# EAGLE board leddisplay2013-1015 (EAGLE 6.5.0)
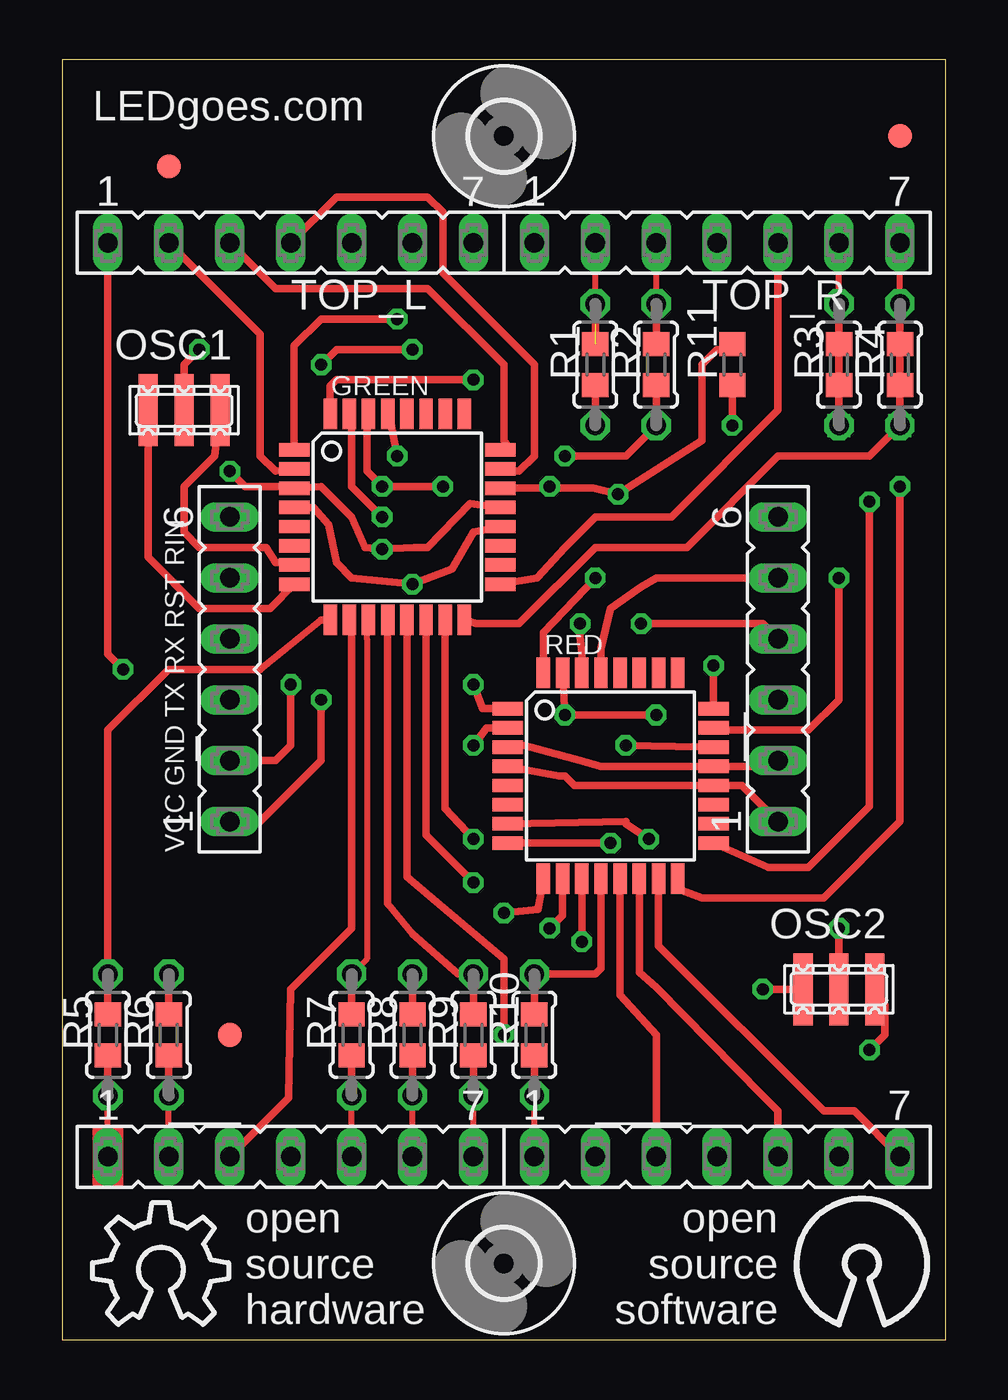
[diagram p0: board, top side]
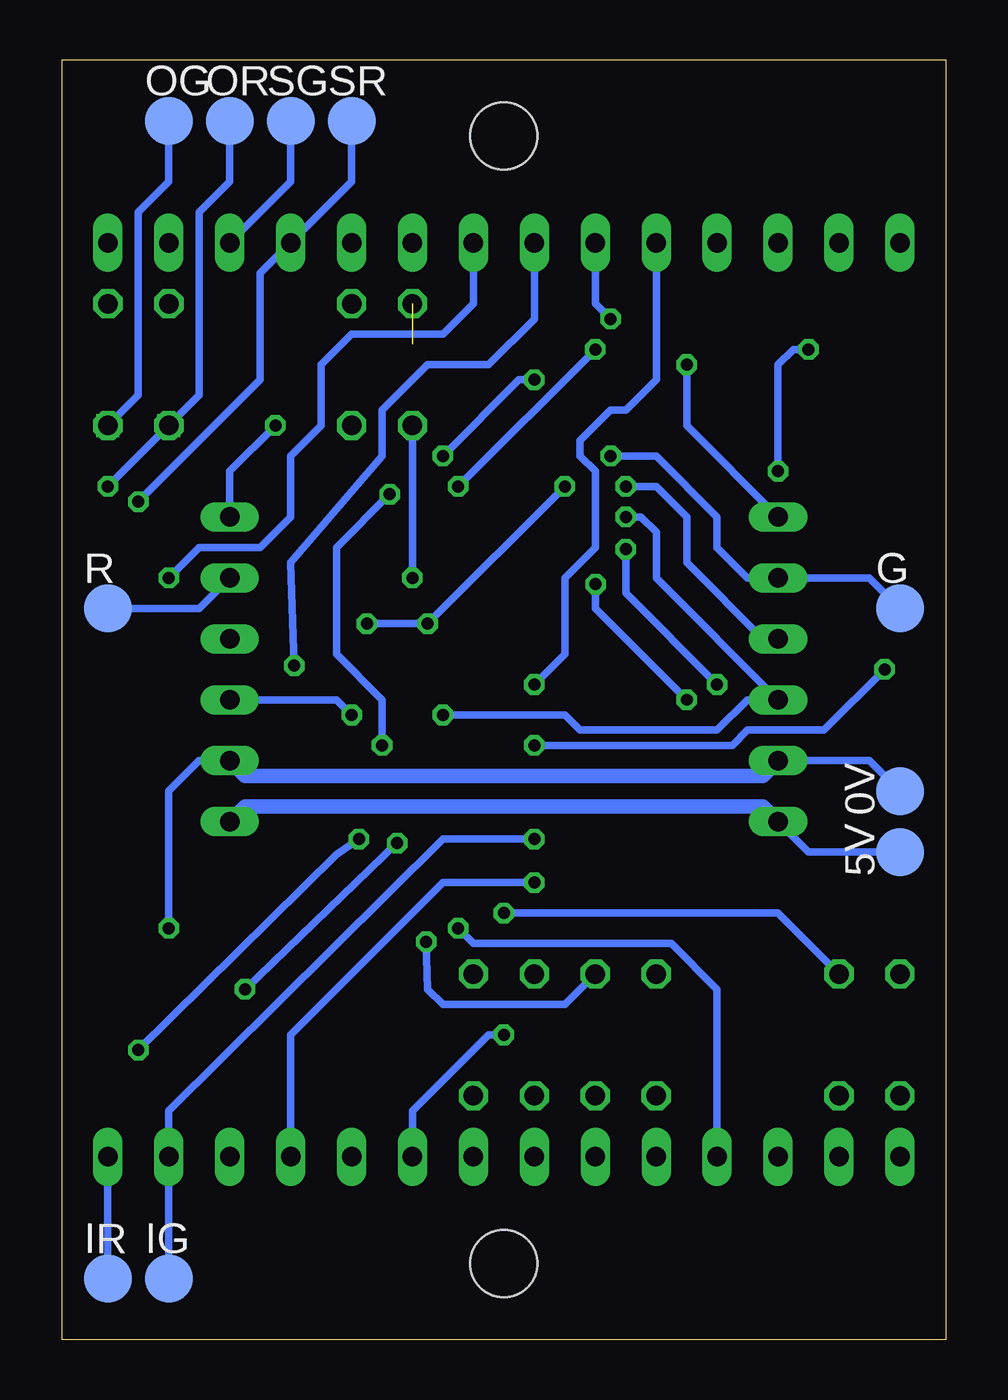
[diagram p1: board, bottom side, seen from below]

Size 36.83 x 53.34 mm. Coordinates in mm from the lower left corner, seen from the top.
Outline: 0,53.34 0,0 36.83,0 36.83,53.34 0,53.34
Copper layers (1*16): Top 0.0356mm / dielectric 1.5011mm / Bottom 0.0356mm
Design rules "LaenPCBOrder *": minimum track width 6mil, minimum drill 13mil, track to track 6mil, track to pad 6mil, pad to pad 6mil, via to via 6mil, smd to smd 6mil, copper to edge 15mil, drill to drill 6mil, minimum pad ring 7mil, minimum via ring 7mil, stop-mask expansion 4mil, vias tented up to drill 0mil, thermal gap 10mil
tKeepout: area 3.2,47.6 to 5.7,50.2; area 5.7,11.4 to 8.3,14; area 33.7,48.9 to 36.2,51.4
bKeepout: area 3.2,47.6 to 5.7,50.2; area 5.7,11.4 to 8.3,14; area 33.7,48.9 to 36.2,51.4

## Footprints (pad centres in the part's own frame; a part is rotated, then mirrored left to right if it is on the bottom)
TP20R = smd 2 x 2: TP 0,0
FE06 = drill 0.813 long: 1 -6.35,0; 2 -3.81,0; 3 -1.27,0; 4 1.27,0; 5 3.81,0; 6 6.35,0
FE07 = drill 0.813 long: 1 -7.62,0; 2 -5.08,0; 3 -2.54,0; 4 0,0; 5 2.54,0; 6 5.08,0; 7 7.62,0
0204/5 = drill 0.813 octagon: 1 -2.54,0; 2 2.54,0
2,8 = hole 2.8: 0,0
FIDUCIAL_1MM = smd 1 x 1: 1 0,0
TQFP32-08 = smd 1.27 x 0.559: 1 -4.293,2.8; 2 -4.293,2; 3 -4.293,1.2; 4 -4.293,0.4; 5 -4.293,-0.4; 6 -4.293,-1.2; 7 -4.293,-2; 8 -4.293,-2.8; 17 4.293,-2.8; 18 4.293,-2; 19 4.293,-1.2; 20 4.293,-0.4; 21 4.293,0.4; 22 4.293,1.2; 23 4.293,2; 24 4.293,2.8 | smd 0.559 x 1.27: 9 -2.8,-4.293; 10 -2,-4.293; 11 -1.2,-4.293; 12 -0.4,-4.293; 13 0.4,-4.293; 14 1.2,-4.293; 15 2,-4.293; 16 2.8,-4.293; 25 2.8,4.293; 26 2,4.293; 27 1.2,4.293; 28 0.4,4.293; 29 -0.4,4.293; 30 -1.2,4.293; 31 -2,4.293; 32 -2.8,4.293
CSTCR-G = smd 0.8 x 3: 1 -1.5,0; 2 0,0; 3 1.5,0
R0603 = smd 1 x 1.1: 1 -0.85,0; 2 0.85,0

## Placement (x,y rotation side)
0V  [TP20R]  1.91,22.86 90 bottom
5V  [TP20R]  1.91,20.32 90 bottom
_  [FE06]  6.99,27.94 90 top
__  [FE06]  29.85,27.94 90 top
___  [FE07]  9.53,7.62 0 top
____  [FE07]  27.3,7.62 0 top
E$1  [OSHW_8X200_NOTEXT]  1.27,0.64 0 top
E$2  [0204/5]  34.93,40.64 90 top
E$3  [2,8]  18.42,50.16 0 top
E$4  [2,8]  18.42,3.17 0 top
E$5  [FIDUCIAL_1MM]  4.45,48.89 0 top
E$6  [FIDUCIAL_1MM]  34.93,50.16 0 top
E$7  [0204/5]  32.38,40.64 90 top
E$8  [0204/5]  24.77,40.64 90 top
E$9  [0204/5]  22.23,40.64 90 top
E$10  [0204/5]  1.91,12.7 90 top
E$11  [0204/5]  4.45,12.7 90 top
E$12  [0204/5]  12.06,12.7 90 top
E$13  [0204/5]  14.6,12.7 90 top
E$14  [0204/5]  17.14,12.7 90 top
E$15  [0204/5]  19.69,12.7 90 top
E$16  [FIDUCIAL_1MM]  6.99,12.7 0 top
G  [TP20R]  1.91,30.48 0 bottom
GREEN  [TQFP32-08]  13.97,34.29 0 top
IG  [TP20R]  32.38,2.54 0 bottom
IR  [TP20R]  34.93,2.54 0 bottom
OG  [TP20R]  32.38,50.8 0 bottom
OR  [TP20R]  29.85,50.8 0 bottom
OSC1  16MHz  [CSTCR-G]  5.08,38.73 0 top
OSC2  16MHz  [CSTCR-G]  32.38,14.61 0 top
R  [TP20R]  34.93,30.48 0 bottom
R1  [R0603]  22.23,40.64 90 top
R2  [R0603]  24.77,40.64 90 top
R3  [R0603]  32.38,40.64 90 top
R4  [R0603]  34.93,40.64 90 top
R5  [R0603]  1.91,12.7 90 top
R6  [R0603]  4.45,12.7 90 top
R7  [R0603]  12.06,12.7 90 top
R8  [R0603]  14.6,12.7 90 top
R9  [R0603]  17.14,12.7 90 top
R10  [R0603]  19.69,12.7 90 top
R11  [R0603]  27.94,40.64 90 top
RED  [TQFP32-08]  22.86,23.49 0 top
SG  [TP20R]  27.3,50.8 0 bottom
SR  [TP20R]  24.77,50.8 0 bottom
TOP_L  [FE07]  9.53,45.72 0 top
TOP_R  [FE07]  27.3,45.72 0 top

## Library data of the parts
0V 5V G IG IR OG OR R SG SR = testpad
_ __ ___ ____ TOP_L TOP_R = con-lsta
E$1 = ohw-logo
E$2 E$7-E$15 R1-R11 = rcl
E$3 E$4 = holes
E$5 E$6 E$16 OSC1 OSC2 = adafruit
GREEN RED = atmega8

## Nets
S$1: ___.1 E$10.1
S$2: ___.3 GREEN.10
S$3: ___.5 E$12.1
S$4: ___.7 E$14.1
S$5: ____.2 GREEN.13
S$6: ____.4 GREEN.14
S$7: ____.6 GREEN.15 IG.TP
S$8: ___.2 E$11.1
S$9: ___.4 RED.10
S$10: ___.6 E$13.1
S$11: ____.1 E$15.1
S$12: ____.3 RED.13
S$13: GREEN.2 TOP_L.2
S$14: ____.7 IR.TP RED.15
S$15: E$7.2 OR.TP TOP_R.6
S$16: OSC2.3 RED.7
S$17: E$9.2 R1.2 TOP_R.2
S$18: RED.1 TOP_L.5
S$19: RED.2 TOP_L.1
S$20: GREEN.1 TOP_L.6
S$21: OSC2.1 RED.8
S$22: E$8.2 TOP_R.3
S$23: _.5 G.TP GREEN.29
S$24: E$2.2 OG.TP TOP_R.7
S$25: E$10.2 GREEN.9
S$26: E$11.2 RED.9
S$27: E$9.1 RED.32
S$28: E$12.2 GREEN.11
S$29: _.4 __.4 GREEN.30 RED.30
S$30: E$14.2 GREEN.12
S$31: E$15.2 RED.12
S$32: E$2.1 GREEN.16
S$33: E$7.1 RED.16
S$34: E$8.1 GREEN.32
S$35: ____.5 RED.14
S$36: E$13.2 RED.11
S$37: RED.17 SR.TP TOP_R.4
S$38: GREEN.8 OSC1.1
S$39: GREEN.7 OSC1.3
S$40: RED.24 TOP_L.7
S$41: RED.23 TOP_R.1
S$42: GREEN.23 TOP_L.4
S$43: GREEN.17 SG.TP TOP_R.5
S$44: GREEN.24 TOP_L.3
S$45: 5V.TP _.1 __.1 GREEN.4 GREEN.20 RED.4 RED.20
S$46: __.6 R11.1
S$47: 0V.TP _.2 __.2 GREEN.3 GREEN.21 OSC1.2 OSC2.2 RED.3 RED.21
S$48: _.6 GREEN.22 R11.2 RED.22
S$49: __.5 R.TP RED.29
S$50: _.3 __.3 GREEN.31 RED.31

## Tracks (layer width: path | path; a pad name or v marks a point on that pad's centre or on a via)
S$1
  Top 0.254: ___.1 E$10.1
  Top 0.305: 1.91,12.07 E$10.1
S$2
  Top 0.305: GREEN.10 12.06,29.36 12.06,17.14 9.53,14.61 9.43,10.07 ___.3
S$3
  Top 0.254: ___.5 E$12.1
  Top 0.305: 12.06,12.07 E$12.1
S$4
  Top 0.254: ___.7 E$14.1
  Top 0.305: 17.14,11.43 E$14.1
S$5  (via drill 0.5 pad 0.25)
  Top 0.305: GREEN.13 14.37,19.29 15.88,18.02 18.42,15.88 v18.42,12.7
  Bottom 0.305: v18.42,12.7 19.05,12.7 22.23,9.53 ____.2
S$6  (via drill 0.5 pad 0.25)
  Top 0.305: GREEN.14 15.17,21.02 v17.14,19.05
  Bottom 0.305: v17.14,19.05 20.96,19.05 27.3,12.7 ____.4
S$7  (via drill 0.5 pad 0.25)
  Top 0.305: GREEN.15 15.97,22.13 v17.14,20.86
  Bottom 0.305: v17.14,20.86 20.96,20.86 32.38,9.53 ____.6 IG.TP
S$8
  Top 0.254: ___.2 E$11.1
  Top 0.305: 4.45,11.43 E$11.1
S$9  (via drill 0.5 pad 0.25)
  Top 0.305: RED.10 20.86,17.68 v20.32,17.14
  Bottom 0.305: v20.32,17.14 19.69,16.51 11.43,16.51 9.53,14.61 ___.4
S$10
  Top 0.254: ___.6 E$13.1
  Top 0.305: 14.6,12.07 E$13.1
S$11
  Top 0.254: ____.1 E$15.1
  Top 0.305: 19.69,12.07 E$15.1
S$12
  Top 0.305: RED.13 23.26,14.37 24.77,12.7 ____.3
S$13
  Top 0.305: GREEN.2 8.89,36.2 8.25,36.83 8.25,41.91 TOP_L.2
S$14
  Top 0.305: RED.15 24.86,16.41 31.75,9.53 33.02,9.53 ____.7
  Bottom 0.305: ____.7 IR.TP
S$15  (via drill 0.6)
  Top 0.254: E$7.2 TOP_R.6
  Top 0.305: v32.38,38.1 E$7.2
  Bottom 0.305: OR.TP 29.85,48.26 31.12,46.99 31.12,39.37 v32.38,38.1
S$16  (via drill 0.5 pad 0.25)
  Top 0.305: RED.7 23.5,21.59 23.5,21.49 v24.46,20.86 | v33.66,12.07 34.29,12.7 34.29,13.97 OSC2.3
  Bottom 0.305: v24.46,20.86 25.4,20.22 v33.66,12.07
S$17  (2 unrouted)
  Top 0.254: E$9.2 TOP_R.2
  Top 0.305: E$9.2 22.23,41.27
S$18  (via drill 0.5 pad 0.25)
  Top 0.305: RED.1 17.52,26.29 v17.14,27.3
  Bottom 0.305: v17.14,27.3 15.88,28.57 15.88,31.75 14.6,33.02 14.6,36.2 15.24,36.83 15.24,37.46 13.97,38.73 13.33,38.73 12.06,40.01 TOP_L.5
S$19  (via drill 0.5, 0.5 pad 0.25)
  Top 0.305: RED.2 17.68,25.49 v17.14,24.77 | v2.54,27.94 1.91,28.57 TOP_L.1
  Bottom 0.305: v17.14,24.77 8.89,24.77 8.25,25.4 5.08,25.4 v2.54,27.94
S$20  (via drill 0.5 pad 0.25)
  Top 0.305: GREEN.1 9.68,41.43 10.79,42.55 v13.97,42.55
  Bottom 0.305: v13.97,42.55 14.6,43.18 TOP_L.6
S$21  (via drill 0.5 pad 0.25)
  Top 0.305: RED.8 v22.86,20.7 | v29.21,14.61 OSC2.1
  Bottom 0.305: v22.86,20.7 v29.21,14.61
S$22
  Top 0.254: E$8.2 TOP_R.3
  Top 0.305: E$8.2 24.77,41.27
S$23  (via drill 0.5 pad 0.25)
  Top 0.305: v13.97,36.83 13.57,38.97 GREEN.29
  Bottom 0.305: v13.97,36.83 12.06,36.83 9.53,34.29 9.53,33.02 8.25,31.75 _.5 3.17,31.75 G.TP
S$24  (via drill 0.6)
  Top 0.254: E$2.2 TOP_R.7
  Top 0.305: v34.93,38.1 E$2.2
  Bottom 0.305: OG.TP 32.38,48.26 33.66,46.99 33.66,39.37 v34.93,38.1
S$25
  Top 0.305: GREEN.9 10.79,30 8.25,27.94 4.45,27.94 1.91,25.4 E$10.2 1.91,13.34
S$26  (via drill 0.5 pad 0.25)
  Top 0.305: RED.9 19.84,17.93 v18.42,17.78 | 4.45,13.34 E$11.2
  Bottom 0.305: E$11.2 6.99,17.78 v18.42,17.78
S$27  (via drill 0.5 pad 0.25)
  Top 0.305: RED.32 20.06,29.47 v22.23,31.75 | E$9.1 22.23,40.01
  Bottom 0.305: v22.23,31.75 E$9.1
S$28
  Top 0.254: E$12.2 12.7,15.88 12.7,29.21 GREEN.11
  Top 0.305: 12.06,13.34 E$12.2
S$29  (via drill 0.5 pad 0.25)
  Top 0.305: 12.7,38.1 12.7,36.2 v13.33,35.56 v15.88,35.56 | v24.13,29.84 29.21,29.84 __.4 | RED.30 21.66,28.64 21.59,29.28 v21.59,29.84
  Top 0.406: GREEN.30 12.7,38.58 12.7,38.1
  Bottom 0.305: _.4 7.62,29.21 10.79,32.38 10.79,34.29 12.06,35.56 v13.33,35.56 | v24.13,29.84 v21.59,29.84 v15.88,35.56
S$30
  Top 0.305: GREEN.12 13.57,18.18 14.6,16.91 16.51,15.24 E$14.2 17.14,13.34
S$31
  Top 0.305: RED.12 22.46,15.48 22.23,15.24 E$15.2 19.69,13.34
S$32
  Top 0.305: GREEN.16 17.25,29.84 19.05,29.84 22.23,33.02 26.04,33.02 29.85,36.83 33.66,36.83 E$2.1 34.93,40.01
S$33  (via drill 0.5 pad 0.25)
  Top 0.305: E$7.1 32.38,39.37 | v34.93,35.56 34.93,21.59 31.75,18.41 26.67,18.41 25.66,18.79 RED.16
  Bottom 0.305: E$7.1 v34.93,35.56
S$34  (via drill 0.5 pad 0.25)
  Top 0.305: 24.77,40.01 E$8.1 23.5,36.83 v20.96,36.83 | GREEN.32 11.17,39.74 11.43,40.01 v17.14,40.01
  Bottom 0.305: v17.14,40.01 17.78,40.01 v20.96,36.83
S$35
  Top 0.305: RED.14 24.06,15.31 24.77,14.68 29.21,10.16 29.85,9.53 ____.5
S$36  (via drill 0.5 pad 0.25)
  Top 0.305: v21.66,16.58 RED.11 | 14.6,13.34 E$13.2
  Bottom 0.305: v21.66,16.58 21.59,14.61 20.96,13.97 15.88,13.97 E$13.2
S$37  (via drill 0.5 pad 0.25)
  Top 0.305: RED.17 29.43,19.68 31.12,19.68 33.66,22.22 v33.66,34.92
  Bottom 0.305: v33.66,34.92 28.58,40.01 28.58,44.45 TOP_R.4 24.77,48.26 SR.TP
S$38
  Top 0.305: OSC1.1 3.58,32.62 5.71,30.48 8.67,30.48 GREEN.8
S$39
  Top 0.305: OSC1.3 6.35,36.83 5.08,35.56 5.08,33.66 5.71,33.02 8.5,33.02 8.89,32.38 9.58,32.38 GREEN.7
S$40  (via drill 0.5 pad 0.25)
  Top 0.305: RED.24 v27.15,28.09
  Bottom 0.305: v27.15,28.09 27.3,32.38 23.5,36.83 23.5,38.73 21.59,40.64 19.05,40.64 17.14,42.55 TOP_L.7
S$41  (via drill 0.5 pad 0.25)
  Top 0.305: v32.38,31.75 32.38,26.67 31.12,25.4 27.88,25.4 RED.23
  Bottom 0.305: TOP_R.1 19.69,43.18 20.96,41.91 24.77,41.91 26.04,40.64 26.04,38.1 27.3,36.83 27.3,34.29 28.58,33.02 31.12,33.02 v32.38,31.75
S$42
  Top 0.305: TOP_L.4 11.43,47.62 15.24,47.62 15.88,46.99 15.88,44.45 19.69,40.64 19.69,36.83 19.05,36.2 18.36,36.2 GREEN.23
S$43
  Top 0.305: TOP_R.5 29.85,38.73 25.4,34.29 22.23,34.29 20.96,33.02 19.79,31.75 GREEN.17
  Bottom 0.305: SG.TP 27.3,48.26 TOP_R.5
S$44
  Top 0.305: GREEN.24 18.68,37.09 18.42,37.46 18.42,40.64 15.24,43.81 8.89,43.81 TOP_L.3
S$45  (via drill 0.5 pad 0.25)
  Top 0.305: GREEN.4 10.48,34.69 11.11,33.97 11.43,32.38 12.06,31.75 v14.6,31.48 16.25,32.12 17.14,33.66 GREEN.20 | _.1 8.25,21.59 10.79,24.13 v10.79,26.67 | __.1 28.34,23.09 RED.20 21.36,23.09 20.96,23.49 20.71,23.49 RED.4
  Bottom 0.305: v10.79,26.67 14.6,30.48 v14.6,31.48 | _.1 5.71,20.32 5V.TP
  Bottom 0.61: _.1 7.62,22.22 29.21,22.22 __.1
S$46  (via drill 0.5 pad 0.25)
  Top 0.305: R11.1 v27.94,38.1
  Bottom 0.305: v27.94,38.1 29.85,36.2 __.6
S$47  (via drill 0.5 pad 0.25)
  Top 0.305: GREEN.21 16.99,34.85 15.24,33.02 14.67,33.02 v13.33,32.95 12.63,33.02 12.06,34.29 10.79,35.56 GREEN.3 9.61,35.56 7.62,35.56 v6.99,36.2 | _.2 8.89,24.13 9.53,24.77 v9.53,27.3 | RED.3 19.27,24.77 21.59,24.13 22.46,23.89 RED.21 28.98,23.89 __.2 | v32.38,17.14 OSC2.2 | OSC1.2 5.08,40.64 v5.71,41.27
  Bottom 0.305: v9.53,27.3 13.33,31.11 v13.33,32.95 | v32.38,17.14 32.38,22.86 31.12,24.13 __.2 | v5.71,41.27 6.35,41.27 6.99,40.64 v6.99,36.2 | 0V.TP 3.17,24.13 _.2
  Bottom 0.61: _.2 7.62,23.49 29.21,23.49 __.2
S$48  (via drill 0.5 pad 0.25)
  Top 0.305: GREEN.22 20.32,35.49 | 20.32,35.49 22.16,35.49 v23.18,35.24 26.67,37.46 26.67,40.64 27.3,41.27 27.73,41.27 R11.2 | RED.22 26.6,24.7 v23.5,24.77 | v10.79,40.64 11.43,41.27 v14.6,41.27 | v20.32,35.56 20.32,35.49
  Bottom 0.305: v23.5,24.77 23.5,26.67 25.4,28.57 25.4,33.02 v23.18,35.24 | _.6 10.79,38.1 v10.79,40.64 | v14.6,41.27 v20.32,35.56
S$49
  Top 0.305: RED.29 22.46,28.81 22.86,30.48 24.13,31.36 24.77,31.75 __.5
  Bottom 0.305: __.5 31.12,30.48 R.TP
S$50  (via drill 0.5 pad 0.25)
  Top 0.305: RED.31 v20.96,26.04 v24.77,26.04 | v13.33,34.29 12.06,35.56 12.06,38.49 GREEN.31
  Bottom 0.305: v24.77,26.04 25.4,26.67 __.3 | v20.96,26.04 15.88,26.04 15.24,25.4 9.53,25.4 8.25,26.67 _.3 12.06,31.75 12.06,33.66 12.7,34.29 v13.33,34.29
(copper drawn outside any net)
  shapes: Top area x1

## Text on the board
tNames: LEDgoes.com | VCC GND TX RX RST RIN | open / source / hardware | open / source / software